# Altium PCB MacroHardPCB.PcbDoc
Units mil, origin at the board's own origin, x right, y up, seen from the top; angles counter-clockwise.
Board outline 3245 x 2910 mil, 4 copper layers (Top, L2, L3, Bottom), stack 59.693 mil thick; 99 components, 88 nets, 351 pads, 130 vias.
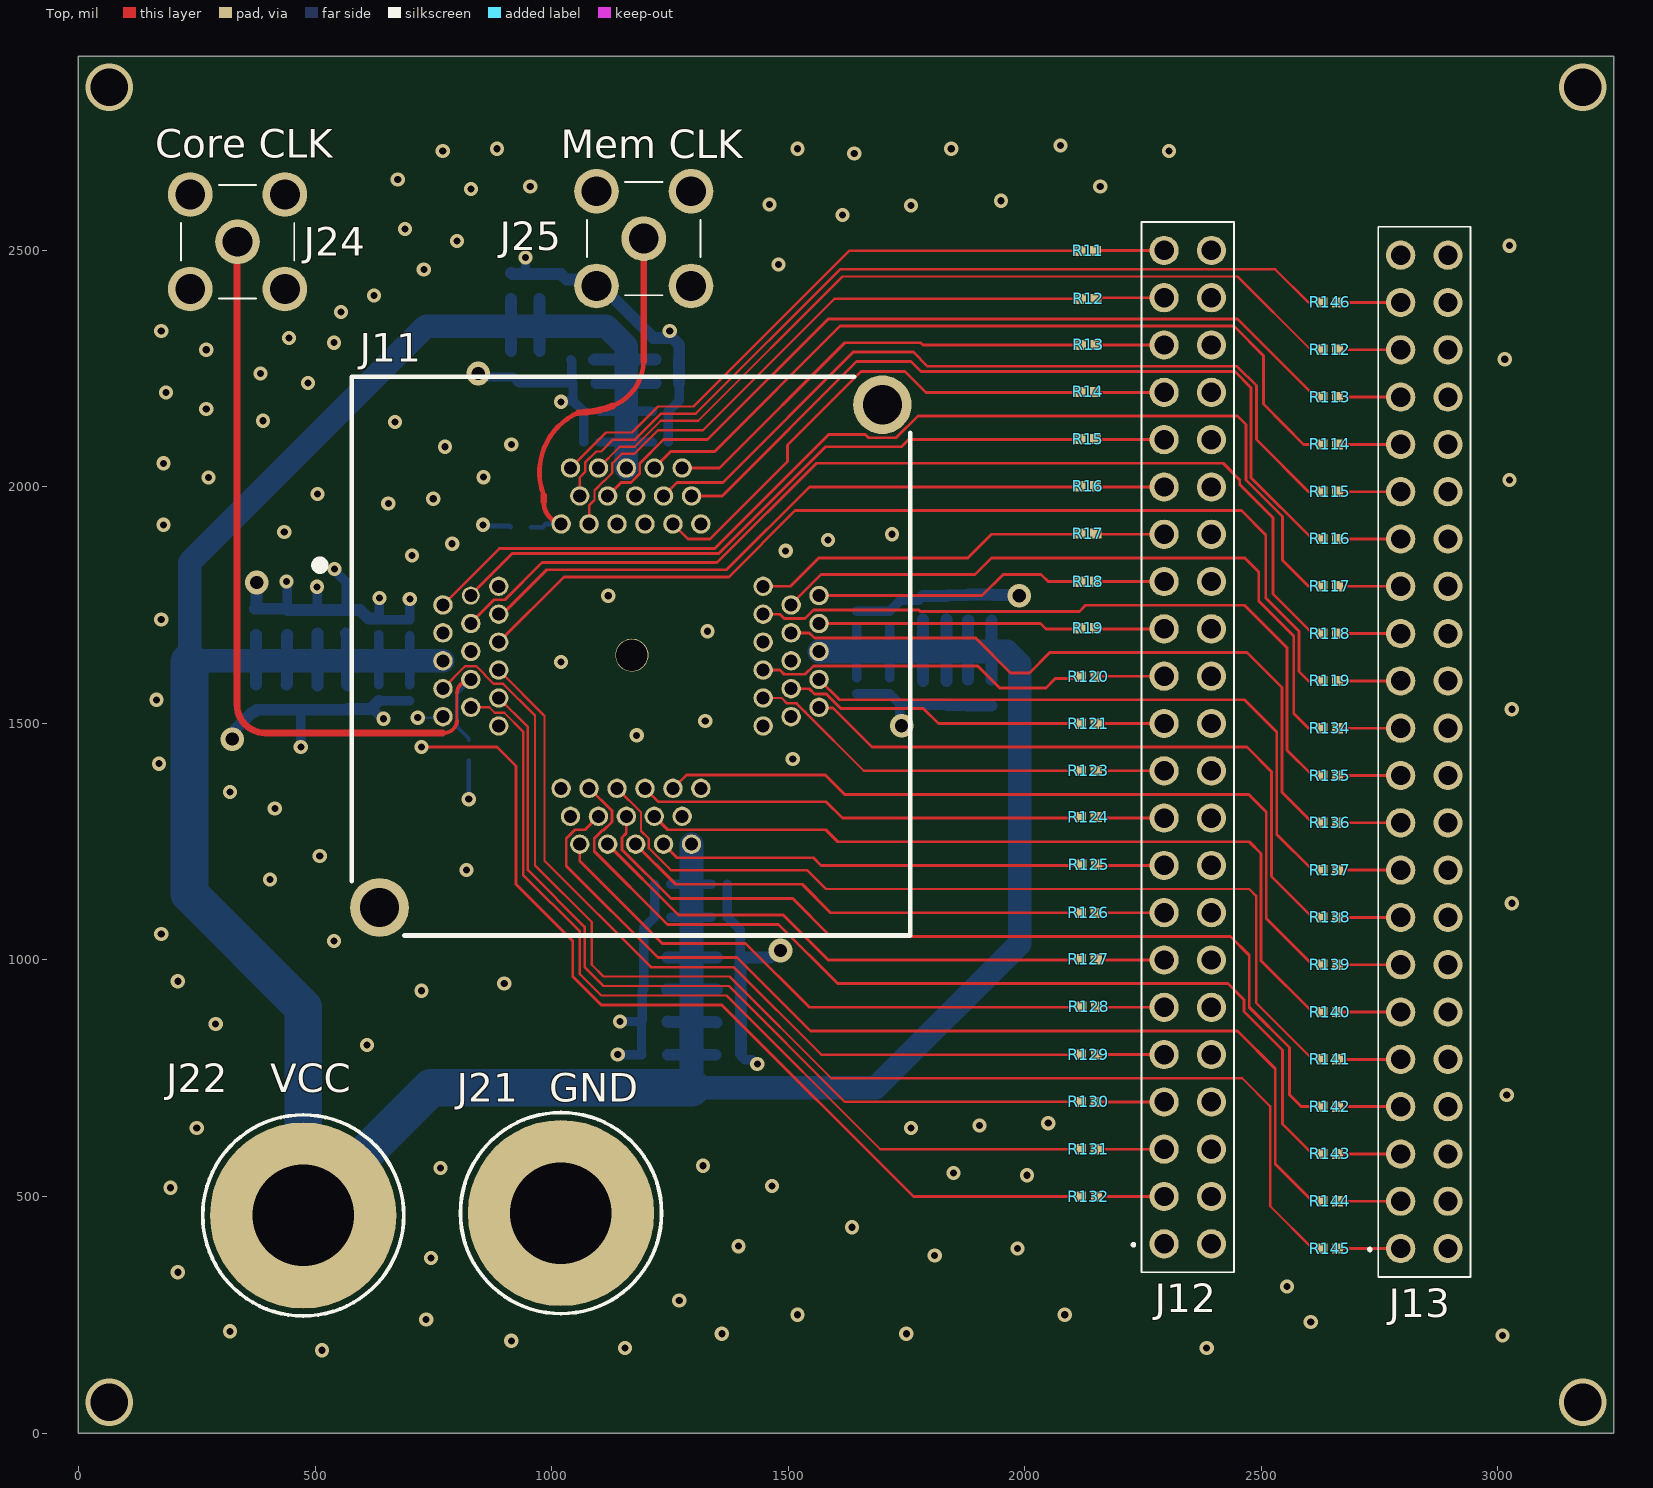
[diagram p0: Top view]
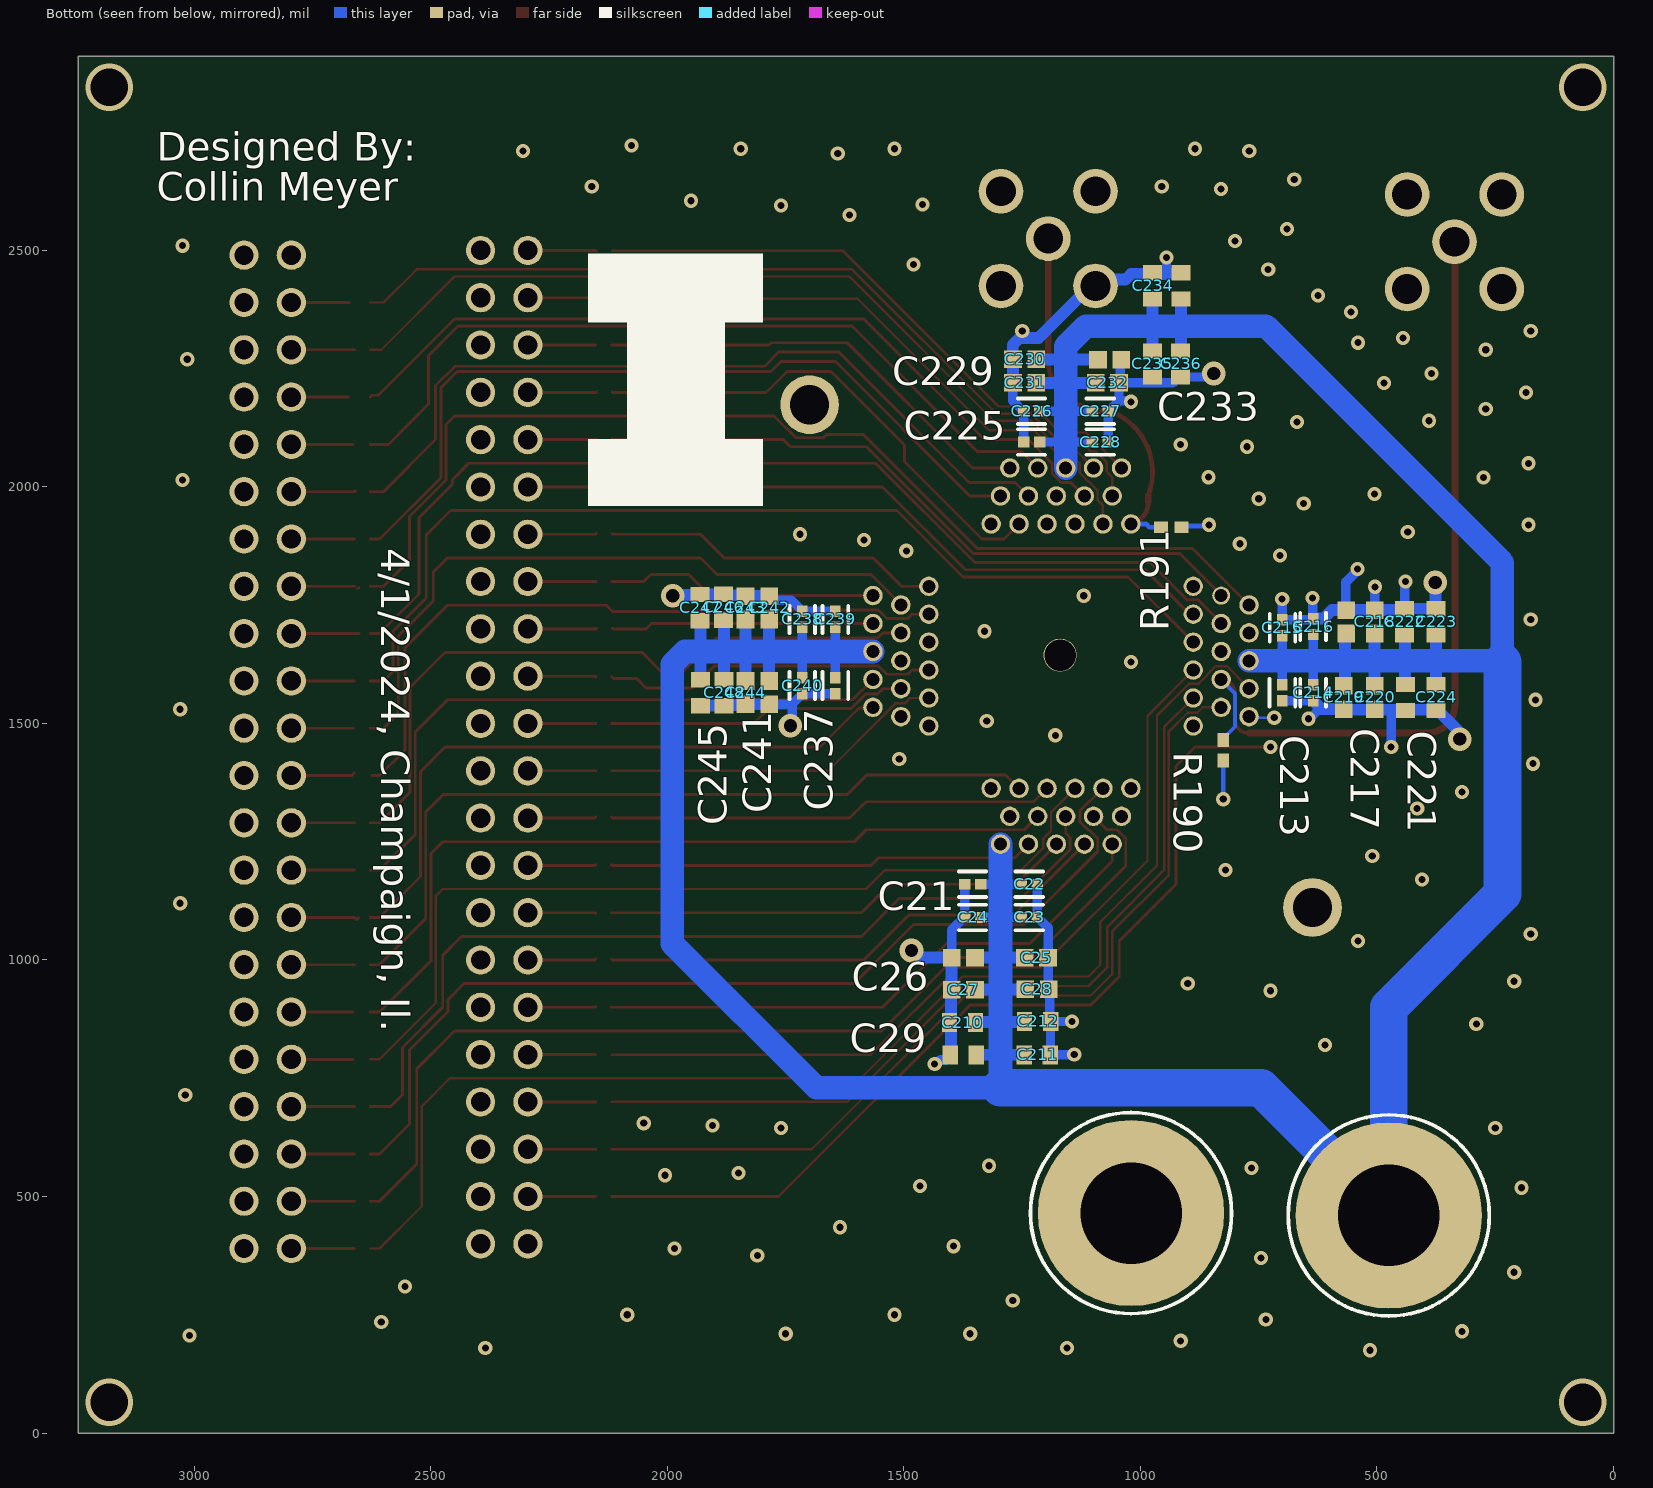
[diagram p1: Bottom view, seen from below]
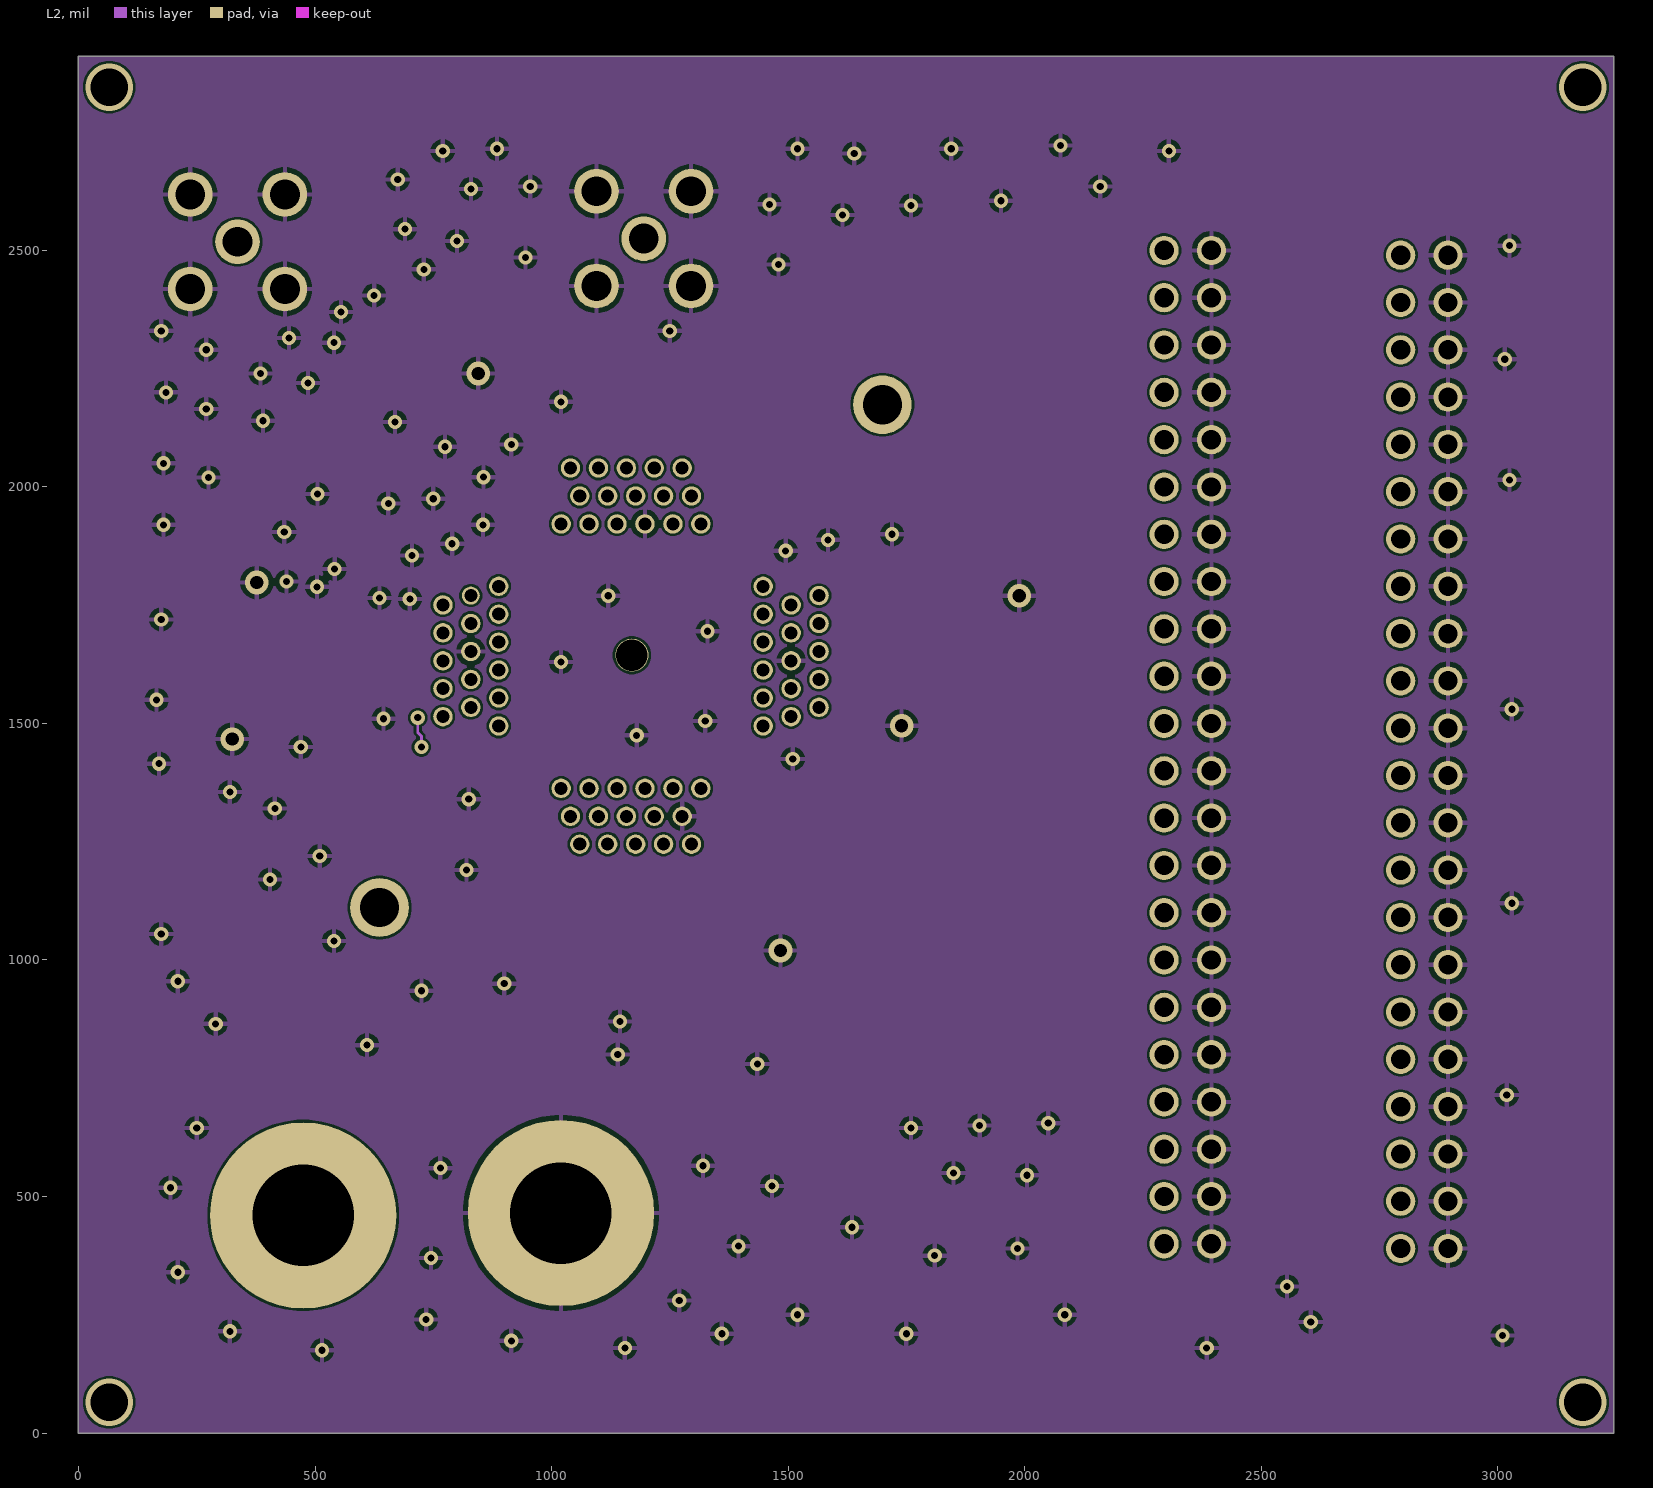
[diagram p2: L2]
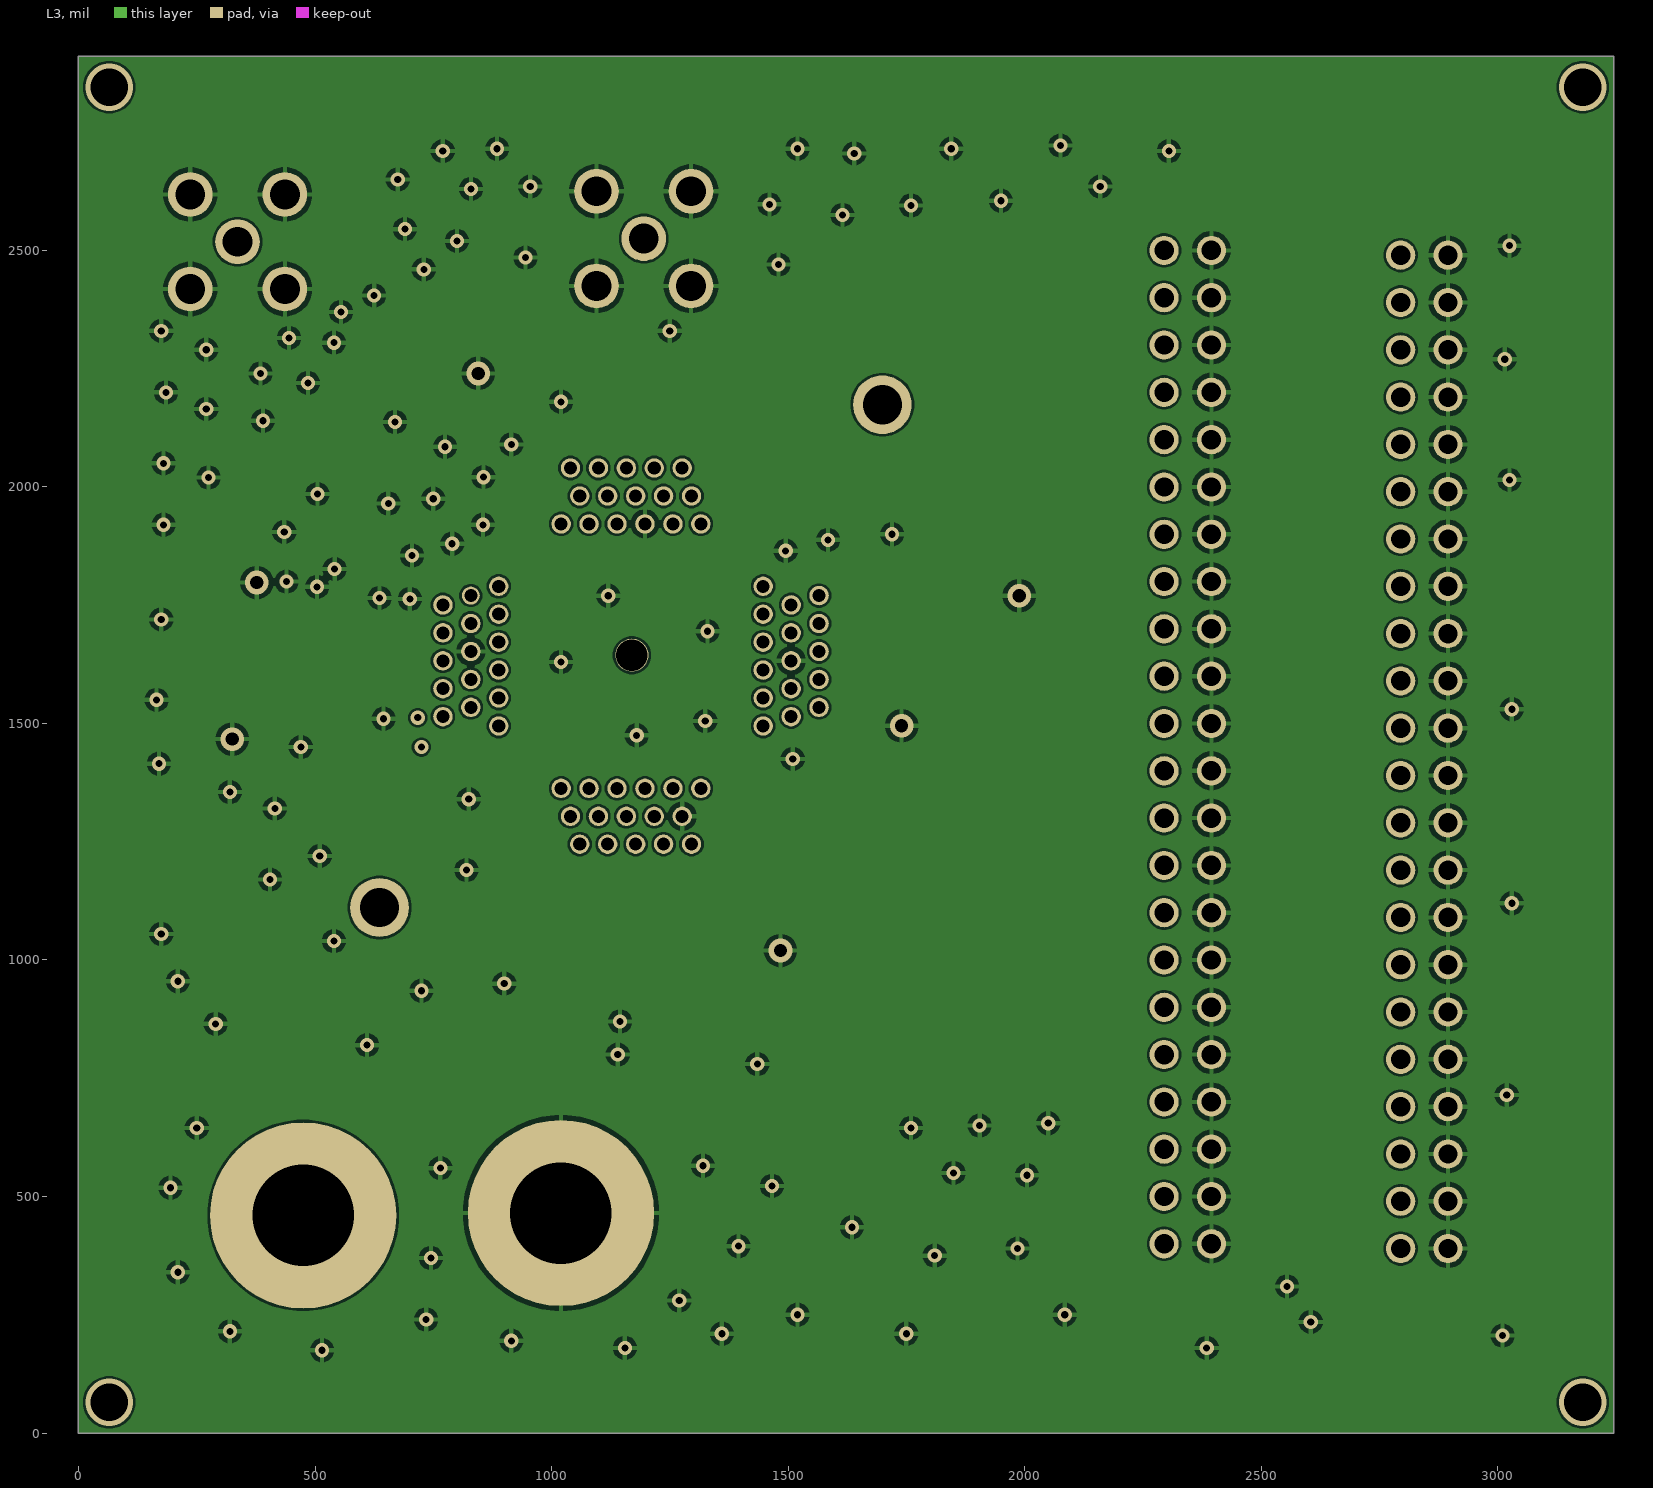
[diagram p3: L3]
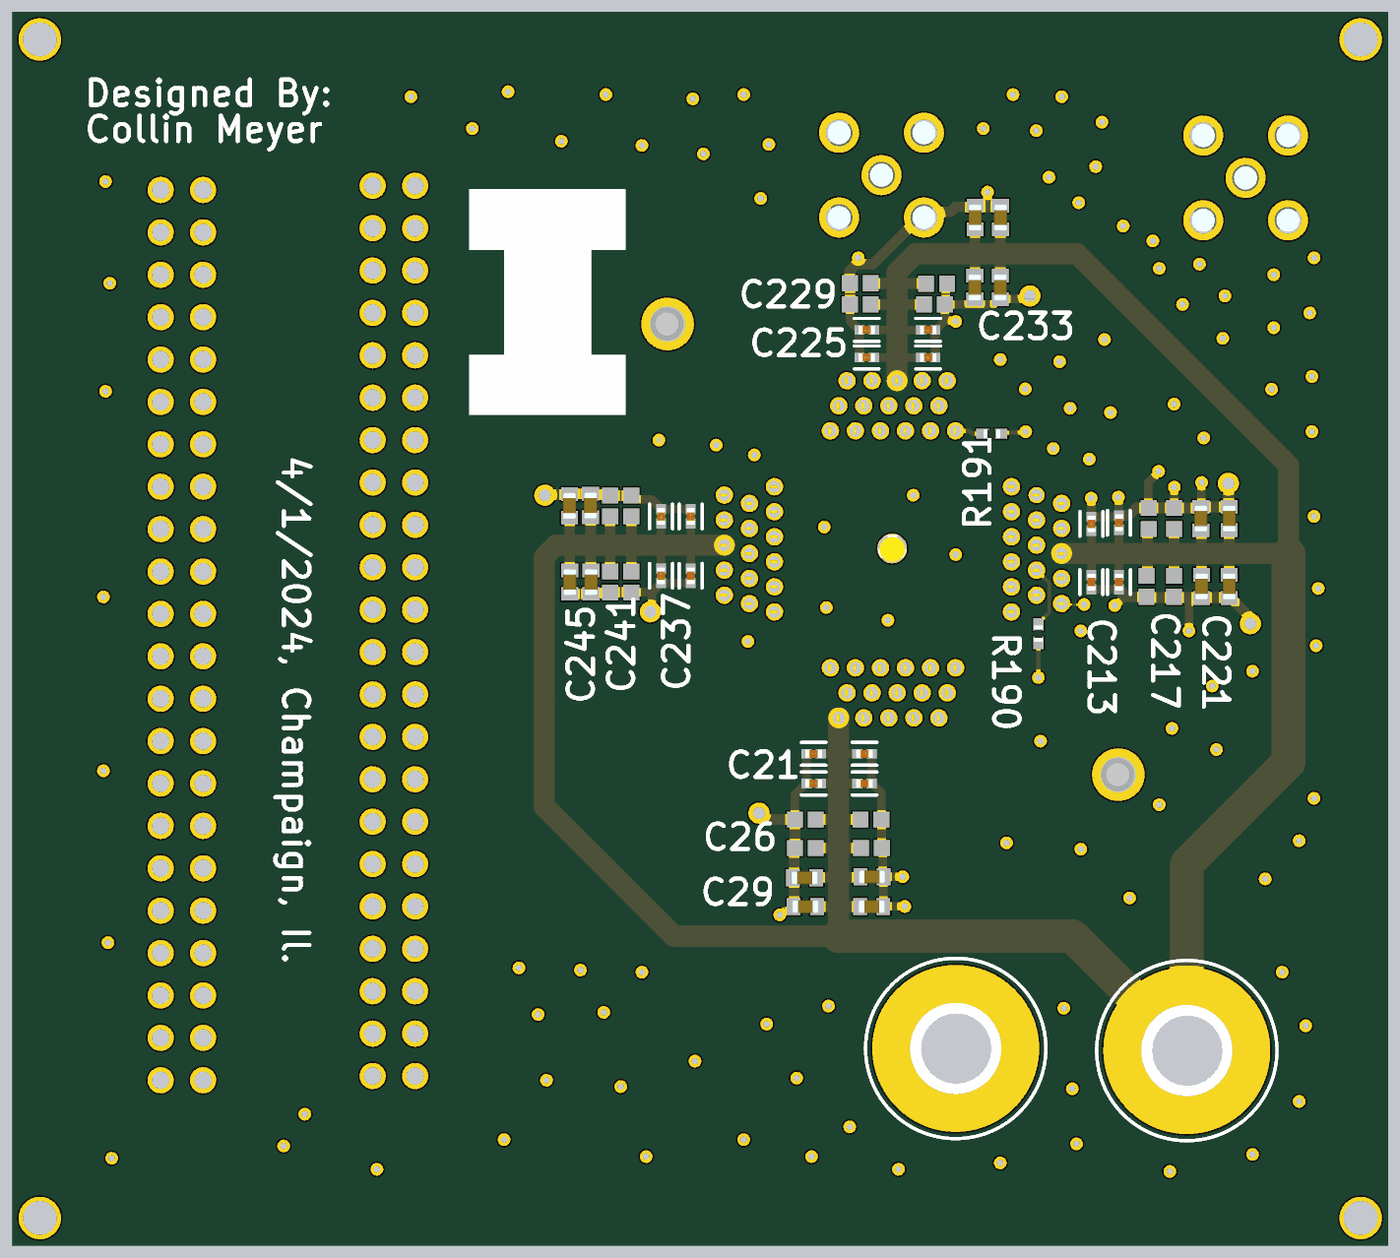
[diagram p4: 3D render of the assembled board from below, using the file's embedded part models]

## Layer stack, top to bottom
Top Solder: solder mask 1, Solder Resist, Dk 3.6
Top: signal copper 1.7008
Prepreg 1: prepreg 7.9567, FR-4, Dk 3.61
L2: signal copper 0.689
Core: core 39, FR-4, Dk 3.61
L3: signal copper 0.689
Prepreg 2: prepreg 7.9567, FR-4, Dk 3.61
Bottom: signal copper 1.7008
Bottom Solder: solder mask 1, Solder Resist, Dk 3.6

## Board outline
0,0 3245,0 3245,2910 0,2910

## Design rules (kind name [scope] priority, off if disabled: settings)
Clearance Clearance_1 [(ExistsOnLayer('L2') Or ExistsOnLayer('L3')) vs (ExistsOnLayer('L2') Or ExistsOnLayer('L3'))] p1: gap=5 ignorepadtopadclearanceinfootprint=FALSE sourcerule=38 cellrowname=All cellrowtype=0 cellcolname=All cellcoltype=0 innerlayers=TRUE
Clearance Clearance_2 [(ExistsOnLayer('Top') Or ExistsOnLayer('Bottom')) vs (ExistsOnLayer('Top') Or ExistsOnLayer('Bottom'))] p2: gap=5 ignorepadtopadclearanceinfootprint=FALSE sourcerule=38 cellrowname=All cellrowtype=0 cellcolname=All cellcoltype=0 outerlayers=TRUE
Clearance [All] p3: gap=10 ignorepadtopadclearanceinfootprint=FALSE ismatrix=TRUE
HoleSize [All] p1: absolutevalues=TRUE maxlimit=100 minlimit=5 maxpercent=80.000 minpercent=20.000
MinimumAnnularRing MinimumAnnularRing_1 [All] p1: minimumring=4
PolygonConnect [All] p1: connectstyle=Relief reliefconductorwidth=10 reliefentries=4 polygonreliefangle="90 Angle" airgapwidth=10
RoutingVias [All] p1: holewidth=28 width=50 viastyle="Through Hole" minholewidth=28 minwidth=50 maxholewidth=28 maxwidth=50
SolderMaskExpansion [All] p1: expansion=4 istentingtop=FALSE
Width MaxMinWidth_1 [All] p1: maxlimit=50 minlimit=5 preferedwidth=5 minimp=50.000000 maximp=50.000000 favimp=50.000000
Width [All] p2: maxlimit=10 minlimit=10 preferedwidth=10
29 further rules are at their usual default settings.

## Classes and differential pairs
component class Main: J11 J12 J13 R11 R12 R13 R14 R15 R16 R17 R18 R19 R112 R113 R114 R115 R116 R117 R118 R119 R120 R121 R123 R124 R125 R126 R127 R128 R129 R130 R131 R132 R134 R135 R136 R137 R138 R139 R140 R141 R142 R143 R144 R145 R146 R190 R191
component class Connectors: C21 C22 C23 C24 C25 C26 C27 C28 C29 C210 C211 C212 C213 C214 C215 C216 C217 C218 C219 C220 C221 C222 C223 C224 C225 C226 C227 C228 C229 C230 C231 C232 C233 C234 C235 C236 C237 C238 C239 C240 C241 C242 C243 C244 C245 C246 C247 C248 J21 J22 J24 J25

## Components (designator, comment, footprint, x,y, rotation, side; value= is the part's Value field where it differs from the comment)
C21 "UMK105BJ104KV-F" FP-0402-L_1_0_0_05-W_0_5-IPC_B 1355,1160 r180 bottom
C22 "UMK105BJ104KV-F" FP-0402-L_1_0_0_05-W_0_5-IPC_B 1235,1160 r0 bottom
C23 "UMK105BJ104KV-F" FP-0402-L_1_0_0_05-W_0_5-IPC_B 1235,1090 r0 bottom
C24 "UMK105BJ104KV-F" FP-0402-L_1_0_0_05-W_0_5-IPC_B 1355,1090 r180 bottom
C25 "LMK107B7105KA-T" CAPC1608X90X35NL10T25 1220,1005 r180 bottom
C26 "LMK107B7105KA-T" CAPC1608X90X35NL10T25 1374.61,1005 r0 bottom
C27 "LMK107B7105KA-T" CAPC1608X90X35NL10T25 1374.59,937.35 r0 bottom
C28 "LMK107B7105KA-T" CAPC1608X90X35NL10T25 1218.79,937.89 r180 bottom
C29 "KGM15CR51A106MT" CAPC1608X100N 1374.59,799.67 r0 bottom
C210 "KGM15CR51A106MT" CAPC1608X100N 1376.25,867.43 r0 bottom
C211 "KGM15CR51A106MT" CAPC1608X100N 1218.1,799.67 r180 bottom
C212 "KGM15CR51A106MT" CAPC1608X100N 1217.44,870 r180 bottom
C213 "UMK105BJ104KV-F" FP-0402-L_1_0_0_05-W_0_5-IPC_B 700,1565 r90 bottom
C214 "UMK105BJ104KV-F" FP-0402-L_1_0_0_05-W_0_5-IPC_B 635,1565 r90 bottom
C215 "UMK105BJ104KV-F" FP-0402-L_1_0_0_05-W_0_5-IPC_B 699.93,1702.25 r270 bottom
C216 "UMK105BJ104KV-F" FP-0402-L_1_0_0_05-W_0_5-IPC_B 635,1705 r270 bottom
C217 "LMK107B7105KA-T" CAPC1608X90X35NL10T25 565,1715 r90 bottom
C218 "LMK107B7105KA-T" CAPC1608X90X35NL10T25 505,1715 r90 bottom
C219 "LMK107B7105KA-T" CAPC1608X90X35NL10T25 570,1555 r270 bottom
C220 "LMK107B7105KA-T" CAPC1608X90X35NL10T25 505,1555 r270 bottom
C221 "KGM15CR51A106MT" CAPC1608X100N 440,1555 r270 bottom
C222 "KGM15CR51A106MT" CAPC1608X100N 441.79,1714.77 r90 bottom
C223 "KGM15CR51A106MT" CAPC1608X100N 375,1715 r90 bottom
C224 "KGM15CR51A106MT" CAPC1608X100N 375,1555 r270 bottom
C225 "UMK105BJ104KV-F" FP-0402-L_1_0_0_05-W_0_5-IPC_B 1230,2095 r180 bottom
C226 "UMK105BJ104KV-F" FP-0402-L_1_0_0_05-W_0_5-IPC_B 1230,2160 r180 bottom
C227 "UMK105BJ104KV-F" FP-0402-L_1_0_0_05-W_0_5-IPC_B 1085,2160 r0 bottom
C228 "UMK105BJ104KV-F" FP-0402-L_1_0_0_05-W_0_5-IPC_B 1085,2095 r0 bottom
C229 "LMK107B7105KA-T" CAPC1608X90X35NL10T25 1065.33,2268.79 r180 bottom
C230 "LMK107B7105KA-T" CAPC1608X90X35NL10T25 1245,2270 r0 bottom
C231 "LMK107B7105KA-T" CAPC1608X90X35NL10T25 1245,2220 r0 bottom
C232 "LMK107B7105KA-T" CAPC1608X90X35NL10T25 1070,2220 r180 bottom
C233 "KGM15CR51A106MT" CAPC1608X100N 914.25,2425 r90 bottom
C234 "KGM15CR51A106MT" CAPC1608X100N 974.25,2425 r90 bottom
C235 "KGM15CR51A106MT" CAPC1608X100N 975,2260 r270 bottom
C236 "KGM15CR51A106MT" CAPC1608X100N 915,2260 r270 bottom
C237 "UMK105BJ104KV-F" FP-0402-L_1_0_0_05-W_0_5-IPC_B 1645,1580 r90 bottom
C238 "UMK105BJ104KV-F" FP-0402-L_1_0_0_05-W_0_5-IPC_B 1715,1720 r270 bottom
C239 "UMK105BJ104KV-F" FP-0402-L_1_0_0_05-W_0_5-IPC_B 1645,1720 r270 bottom
C240 "UMK105BJ104KV-F" FP-0402-L_1_0_0_05-W_0_5-IPC_B 1715,1580 r90 bottom
C241 "LMK107B7105KA-T" CAPC1608X90X35NL10T25 1785,1565.39 r270 bottom
C242 "LMK107B7105KA-T" CAPC1608X90X35NL10T25 1785,1744.61 r90 bottom
C243 "LMK107B7105KA-T" CAPC1608X90X35NL10T25 1835,1744.61 r90 bottom
C244 "LMK107B7105KA-T" CAPC1608X90X35NL10T25 1835,1565.39 r270 bottom
C245 "KGM15CR51A106MT" CAPC1608X100N 1930,1565 r270 bottom
C246 "KGM15CR51A106MT" CAPC1608X100N 1881.25,1745.72 r90 bottom
C247 "KGM15CR51A106MT" CAPC1608X100N 1930.75,1745 r90 bottom
C248 "KGM15CR51A106MT" CAPC1608X100N 1880,1565 r270 bottom
J11 "264-5205-01" 264-5205-01_1 1699.45,2173.89 r0 top
J12 "SSW-122-01-F-D" SSW-122-XX-YYY-D 2295,400 r270 top
J13 "SSW-122-01-F-D" SSW-122-XX-YYY-D 2795,390 r270 top
J21 "575-4" KSTN-575-4 1020,465 r0 top
J22 "575-4" KSTN-575-4 475,460 r0 top
J24 "0733910070" 0733910070 336.29,2518.41 r0 top
J25 "0733910070" 0733910070 1195,2525 r0 top
R11 "ERJ-U020R00X" RESC1005X40X25NL05T10 2133.4,2498.99 r0 top
R12 "ERJ-U020R00X" RESC1005X40X25NL05T10 2134.45,2397.58 r0 top
R13 "ERJ-U020R00X" RESC1005X40X25NL05T10 2134.97,2300.31 r0 top
R14 "ERJ-U020R00X" RESC1005X40X25NL05T10 2133.39,2200.97 r0 top
R15 "ERJ-U020R00X" RESC1005X40X25NL05T10 2133.39,2101.34 r0 top
R16 "ERJ-U020R00X" RESC1005X40X25NL05T10 2133.39,2001.7 r0 top
R17 "ERJ-U020R00X" RESC1005X40X25NL05T10 2133.75,1901.36 r0 top
R18 "ERJ-U020R00X" RESC1005X40X25NL05T10 2133.75,1799.62 r0 top
R19 "ERJ-U020R00X" RESC1005X40X25NL05T10 2133.4,1701.39 r0 top
R112 "ERJ-U020R00X" RESC1005X40X25NL05T10 2645,2290 r0 top
R113 "ERJ-U020R00X" RESC1005X40X25NL05T10 2645,2190 r0 top
R114 "ERJ-U020R00X" RESC1005X40X25NL05T10 2645,2090 r0 top
R115 "ERJ-U020R00X" RESC1005X40X25NL05T10 2645,1990 r0 top
R116 "ERJ-U020R00X" RESC1005X40X25NL05T10 2645,1890 r0 top
R117 "ERJ-U020R00X" RESC1005X40X25NL05T10 2645,1790 r0 top
R118 "ERJ-U020R00X" RESC1005X40X25NL05T10 2645,1690 r0 top
R119 "ERJ-U020R00X" RESC1005X40X25NL05T10 2645,1590 r0 top
R120 "ERJ-U020R00X" RESC1005X40X25NL05T10 2134.45,1598.59 r0 top
R121 "ERJ-U020R00X" RESC1005X40X25NL05T10 2134.95,1499.66 r0 top
R123 "ERJ-U020R00X" RESC1005X40X25NL05T10 2134.95,1399.67 r0 top
R124 "ERJ-U020R00X" RESC1005X40X25NL05T10 2134.95,1302.15 r0 top
R125 "ERJ-U020R00X" RESC1005X40X25NL05T10 2135.49,1201.46 r0 top
R126 "ERJ-U020R00X" RESC1005X40X25NL05T10 2134.95,1099.36 r0 top
R127 "ERJ-U020R00X" RESC1005X40X25NL05T10 2134.95,1001.79 r0 top
R128 "ERJ-U020R00X" RESC1005X40X25NL05T10 2135.49,901.18 r0 top
R129 "ERJ-U020R00X" RESC1005X40X25NL05T10 2135,800 r0 top
R130 "ERJ-U020R00X" RESC1005X40X25NL05T10 2134.95,700 r0 top
R131 "ERJ-U020R00X" RESC1005X40X25NL05T10 2134.95,600.01 r0 top
R132 "ERJ-U020R00X" RESC1005X40X25NL05T10 2135,500 r0 top
R134 "ERJ-U020R00X" RESC1005X40X25NL05T10 2645,1490 r0 top
R135 "ERJ-U020R00X" RESC1005X40X25NL05T10 2645,1390 r0 top
R136 "ERJ-U020R00X" RESC1005X40X25NL05T10 2645,1290 r0 top
R137 "ERJ-U020R00X" RESC1005X40X25NL05T10 2645,1190 r0 top
R138 "ERJ-U020R00X" RESC1005X40X25NL05T10 2645,1090 r0 top
R139 "ERJ-U020R00X" RESC1005X40X25NL05T10 2645,990 r0 top
R140 "ERJ-U020R00X" RESC1005X40X25NL05T10 2645,890 r0 top
R141 "ERJ-U020R00X" RESC1005X40X25NL05T10 2645,790 r0 top
R142 "ERJ-U020R00X" RESC1005X40X25NL05T10 2645,690 r0 top
R143 "ERJ-U020R00X" RESC1005X40X25NL05T10 2645,590 r0 top
R144 "ERJ-U020R00X" RESC1005X40X25NL05T10 2645,490 r0 top
R145 "ERJ-U020R00X" RESC1005X40X25NL05T10 2645,390 r0 top
R146 "ERJ-U020R00X" RESC1005X40X25NL05T10 2645,2390 r0 top
R190 "RT0402BRE0750RL" RESC1005X35N 825,1443.35 r90 bottom
R191 "RT0402BRE0750RL" RESC1005X35N 935,1915 r0 bottom

## Footprints (in the part's own frame and the unit in brackets; to place one, negate y for a bottom-side part, rotate by r counter-clockwise, add the part's x,y. Pads: shape width x height; smd on the part's side, far side on the other; paste and mask are expansions set on the pad)
264-5205-01_1 [mm]
  round 1.041 hole 0.7: 1(-20.6,-9.75) 3(-23.6,-10.75) 4(-20.6,-11.25) 5(-22.1,-11.75) 6(-23.6,-12.25) 7(-20.6,-12.75) 8(-22.1,-13.25) 9(-23.6,-13.75) 10(-20.6,-14.25) 11(-22.1,-14.75) 12(-23.6,-15.25) 13(-20.6,-15.75) 14(-22.1,-16.25) 15(-23.6,-16.75) 16(-20.6,-17.25) 17(-17.25,-20.6) 18(-16.75,-22.1) 19(-16.25,-23.6) 20(-15.75,-20.6) 21(-15.25,-22.1) 22(-14.75,-23.6) 23(-14.25,-20.6) 24(-13.75,-22.1) 25(-13.25,-23.6) 26(-12.75,-20.6) 27(-12.25,-22.1) 28(-11.75,-23.6) 29(-11.25,-20.6) 30(-10.75,-22.1) 31(-10.25,-23.6) 32(-9.75,-20.6) 33(-6.4,-17.25) 34(-4.9,-16.75) 35(-3.4,-16.25) 36(-6.4,-15.75) 37(-4.9,-15.25) 38(-3.4,-14.75) 39(-6.4,-14.25) 40(-4.9,-13.75) 41(-3.4,-13.25) 42(-6.4,-12.75) 43(-4.9,-12.25) 44(-3.4,-11.75) 45(-6.4,-11.25) 46(-4.9,-10.75) 47(-3.4,-10.25) 48(-6.4,-9.75) 49(-9.75,-6.4) 50(-10.25,-4.9) 51(-10.75,-3.4) 52(-11.25,-6.4) 53(-11.75,-4.9) 54(-12.25,-3.4) 55(-12.75,-6.4) 56(-13.25,-4.9) 57(-13.75,-3.4) 58(-14.25,-6.4) 59(-14.75,-4.9) 60(-15.25,-3.4) 61(-15.75,-6.4) 62(-16.25,-4.9) 63(-16.75,-3.4) 64(-17.25,-6.4)
  round 1.778 hole 1.7: 1(-13.45,-13.45)
  round 0.965 hole 0.7: 2(-22.1,-10.25)
  round 3.15 hole 2.1: 65(0,0) 66(-27,-27)
  silkscreen extent -30.42,-28.5 1.5,1.5, body extent -28.46,-28.5 1.54,1.5, height 16.96
0733910070 [mm]
  round 2.4 hole 1.6: 1(0,0) 2(-2.54,2.54) 3(-2.54,-2.54) 4(2.54,-2.54) 5(2.54,2.54)
  silkscreen extent -3.04,-3.04 3.04,3.04, body extent -3.24,-3.23 3.24,3.23, height 10.1
CAPC1608X90X35NL10T25 [mm] "Chip Capacitor, 2-Leads, Body 1.70x0.90mm, IPC Medium Density"
  rect 0.95x0.95 smd: 1(-0.625,0) 2(0.625,0)
  body extent -0.85,-0.45 0.85,0.45, height 0.9
CAPC1608X100N [mm]
  rect 0.82x1.02 smd: 1(-0.7,0) 2(0.7,0)
  body extent -0.8,-0.4 0.8,0.4, height 1
FP-0402-L_1_0_0_05-W_0_5-IPC_B [mil]
  rect 24.23x22.54 smd paste+0 mask+0: 1(-16.87,0) 2(16.87,0)
  silkscreen extent -29,-27 29,27, body extent -20,-10 20,10, height 22
KSTN-575-4 [mm] "Banana Jack, Non-Insulated, Dia 7.92mm"
  round 10 hole 5.45: 1(0,0)
  silkscreen extent -5.4,-5.4 5.4,5.4, body extent -3.98,-3.96 3.92,3.94, height 2.36
RESC1005X35N [mm]
  rect 0.75x0.6 smd: 1(-0.55,0) 2(0.55,0)
  body extent -0.5,-0.25 0.5,0.25, height 0.35
RESC1005X40X25NL05T10 [mm] "Chip Resistor, 2-Leads, Body 1.00x0.50mm, IPC Medium Density"
  rect 0.6x0.55 smd: 1(-0.425,0) 2(0.425,0)
  body extent -0.53,-0.27 0.53,0.28, height 0.4
SSW-122-XX-YYY-D [mm]
  round 1.57 hole 1.04: 1(0,0) 2(0,2.54) 3(-2.54,0) 4(-2.54,2.54) 5(-5.08,0) 6(-5.08,2.54) 7(-7.62,0) 8(-7.62,2.54) 9(-10.16,0) 10(-10.16,2.54) 11(-12.7,0) 12(-12.7,2.54) 13(-15.24,0) 14(-15.24,2.54) 15(-17.78,0) 16(-17.78,2.54) 17(-20.32,0) 18(-20.32,2.54) 19(-22.86,0) 20(-22.86,2.54) 21(-25.4,0) 22(-25.4,2.54) 23(-27.94,0) 24(-27.94,2.54) 25(-30.48,0) 26(-30.48,2.54) 27(-33.02,0) 28(-33.02,2.54) 29(-35.56,0) 30(-35.56,2.54) 31(-38.1,0) 32(-38.1,2.54) 33(-40.64,0) 34(-40.64,2.54) 35(-43.18,0) 36(-43.18,2.54) 37(-45.72,0) 38(-45.72,2.54) 39(-48.26,0) 40(-48.26,2.54) 41(-50.8,0) 42(-50.8,2.54) 43(-53.34,0) 44(-53.34,2.54)
  silkscreen extent -54.87,-1.7 1.53,3.74

## Part data
C21 C22 C23 C24 C213 C214 C215 C216 C225 C226 C227 C228 C237 C238 C239 C240: library part CMP-14477-000330-2, "None", Capacitance=100nF, Case Code (Imperial)=0402, Case Code (Metric)=1005, Dielectric=X5R, Max Operating Temperature=85°C, Min Operating Temperature=-55°C, Package Quantity=10000, Tolerance=10%, Voltage Rating=50V, Case/Package=0402, Halogen Free="Halogen Free", Height=0.5mm, Length=0.039inch, Mount="Surface Mount", Packaging="Tape and Reel", RoHS Compliant=Yes, Termination=SMD/SMT, Thickness=0.022inch, Voltage Rating (DC)=50V, Width=0.02inch
C25 C26 C27 C28 C217 C218 C219 C220 C229 C230 C231 C232 C241 C242 C243 C244: library part CMP-2000-05445-2, "None", Capacitance=1uF, Case Code (Imperial)=0603, Case Code (Metric)=1608, Dielectric=X7R, Max Operating Temperature=125°C, Min Operating Temperature=-55°C, Package Quantity=1, Resistor Type=Ceramic, Tolerance=10%, Voltage Rating=10V, Case/Package=0603, Construction=Flat, Depth=0.8mm, Halogen Free="Halogen Free", Height=0.8mm, Lead Free="Lead Free", Length=1.6mm, Mount="Surface Mount", Number of Pins=2, Packaging="Tape and Reel", Radiation Hardening=No, REACH SVHC="No SVHC", RoHS Compliant=Yes, Series=M, Termination=SMD/SMT, Thickness=0.035inch, Voltage Rating (DC)=10V, Width=0.031inch
C29 C210 C211 C212 C221 C222 C223 C224 C233 C234 C235 C236 C245 C246 C247 C248: "Capacitor", Manufacturer_Name=AVX, Datasheet Link=https://4donline.ihs.com/images/VipMasterIC/IC/AVXC/AVXC-S-A0018162488/AVXC-S-A0018400965-1.pdf?hkey=EF798316E3902B6ED9A73243A3159BB0, Height=1mm, Manufacturer_Part_Number=KGM15CR51A106MT
J11: "Connector", Manufacturer_Name=3M, Mouser Part Number=517-264-5205-01, Datasheet Link=http://multimedia.3m.com/mws/media/785854O/3mtm-textooltm-open-top-sockets-for-qfn-applications-cd2475.pdf, Manufacturer_Part_Number=264-5205-01, Mouser Price/Stock=https://www.mouser.co.uk/ProductDetail/3M-Electronic-Solutions-Division/264-5205-01?qs=B2toaPEvOxGh%252BVXp%252BJO7wQ%3D%3D
J12 J13: "Connector", Manufacturer_Name=SAMTEC, Mouser Part Number=200-SSW12201FD, Arrow Part Number=SSW-122-01-F-D, Arrow Price/Stock=https://www.arrow.com/en/products/ssw-122-01-f-d/samtec, Datasheet Link=http://suddendocs.samtec.com/prints/ssw-1xx-xx-xxx-x-xx-xxx-xx-mkt.pdf, Manufacturer_Part_Number=SSW-122-01-F-D, Mouser Price/Stock=https://www.mouser.co.uk/ProductDetail/Samtec/SSW-122-01-F-D?qs=92ilVni64gyO3fMj7LXwKw%3D%3D
J21 J22: library part CMP-2000-05649-1, "Banana Jack, Non-Insulated, 1-Pin THD, RoHS, Bulk", Color=-, Manufacturer=Keystone-Electronics, Package Description="1-Pin Through Hole Device, Dia 7.92 mm", Package Version="Rev. B, 11/1994", Body Material=-, Category=Connectors,Interconnects, Contact Finish=Nickel, Contact Material=Brass, Datasheet URL=http://www.keyelco.com/product-pdf.cfm?p=2379, Datasheet Version="Rev. B, 11/1994", Family=BananaandTipConnectors-Jacks,Plugs, Features=-, Gender=Female, Insulation=Non-Insulated, Manufacturer URL=http://www.keyelco.com/, Mounting Technology=ThroughHole, Mounting Type=ThroughHole, Operating Temperature=-, Package Reference=575-4, Package URL=http://www.keyelco.com/product-pdf.cfm?p=2379, Packaging=Bulk, Plug/Mating Plug Diameter=StandardBanana, Series=-, Termination=Solder, Type=BananaJack, Wire Gauge=-
J24 J25: "Connector", Manufacturer_Name=Molex, Mouser Part Number=N/A, Arrow Part Number=0733910070, Arrow Price/Stock=https://www.arrow.com/en/products/0733910070/molex, Datasheet Link=https://www.molex.com/pdm_docs/sd/733910070_sd.pdf, Height=10mm, Manufacturer_Part_Number=0733910070, Mouser Price/Stock=https://www.mouser.co.uk/ProductDetail/Molex/0733910070?qs=PBcRNPEHKsq1tOlFMTxPGQ%3D%3D
R11 R12 R13 R14 R15 R16 R17 R18 R19 R112 R113 R114 R115 R116 R117 R118 R119 R120 R121 R123 R124 R125 R126 R127 R128 R129 R130 R131 R132 R134 R135 R136 R137 R138 R139 R140 R141 R142 R143 R144 R145 R146: library part CMP-2002-06457-1, Manufacturer=Panasonic, Part Number=ERJ-U020R00X
R190 R191: "Resistor", Manufacturer_Name=YAGEO, Mouser Part Number=603-RT0402BRE0750RL, Arrow Part Number=RT0402BRE0750RL, Arrow Price/Stock=https://www.arrow.com/en/products/rt0402bre0750rl/yageo?region=nac, Datasheet Link=https://www.mouser.com/datasheet/2/447/PYu_RT_1_to_0_01_RoHS_L_12-3003070.pdf, Height=0.35mm, Manufacturer_Part_Number=RT0402BRE0750RL, Mouser Price/Stock=https://www.mouser.co.uk/ProductDetail/YAGEO/RT0402BRE0750RL?qs=NgbZBzc1CyFyREnSBGZFUg%3D%3D

## Via types
v1: diameter 30, hole 15, Top to Bottom, 120 vias
v2: diameter 50, hole 28, Top to Bottom, 6 vias
v3: diameter 100, hole 80, Top to Bottom, 4 vias

## Nets (pads, with @x,y where several pads share a name; then routed paths per layer and width w, separated by ;. In a path a pad name is that pad's centre, name@x,y a point inside that pad or via, vN(x,y) a via of type N, cw(c..) or ccw(c..) an arc to the next point about the centre after c; other vN are vias at no path point)
core_clk: J11.11 J24.1 R190.2 | length 1701.5
  Top w5: 800,1505 800,1565
  Top w8: 770,1480 ccw(c772.5,1507.5) 800,1505 ; 800,1565 cw(c827.61,1563.24) J11.11@829.37,1590.86
  Top w14.28: 335,1540 335,2470
  Top w14.29: 335,1540 ccw(c395,1540) 395,1480 770,1480
  L2 w5: J11.11@829.37,1588.54 J11.11
  Bottom w8: R190.2 825,1467.95 799.87,1493.08 799.87,1563.68 J11.11
exc_led: J11.7 R119.1 | length 2132.3
  Top w6: J11.7 1026.5,1810 1375,1810 1515,1950 2458.73,1950 2510,1898.73 2510,1765 2580,1695 2580,1610 2600,1590 R119.1
GND: C21.1 C22.1 C23.1 C24.1 C25.2 C26.2 C27.2 C28.2 C29.2 C210.2 C211.2 C212.2 C213.1 C214.1 C215.1 C216.1 C217.2 C218.2 C219.2 C220.2 C221.2 C222.2 C223.2 C224.2 C225.1 C226.1 C227.1 C228.1 C229.2 C230.2 C231.2 C232.2 C233.2 C234.2 C235.2 C236.2 C237.1 C238.1 C239.1 C240.1 C241.2 C242.2 C243.2 C244.2 C245.2 C246.2 C247.2 C248.2 J11.8 J11.30 J11.40 J11.55 J12.2 J12.4 J12.6 J12.8 J12.10 J12.12 J12.14 J12.16 J12.18 J12.20 J12.22 J12.24 J12.26 J12.28 J12.30 J12.32 J12.34 J12.36 J12.38 J12.40 J12.42 J12.44 J13.2 J13.4 J13.6 J13.8 J13.10 J13.12 J13.14 J13.16 J13.18 J13.20 J13.22 J13.24 J13.26 J13.28 J13.30 J13.32 J13.34 J13.36 J13.38 J13.40 J13.42 J13.44 J21.1 J24.2 J24.3 J24.4 J24.5 J25.2 J25.3 J25.4 J25.5 R190.1 R191.1 | length 4141.2
  Top w5: J11.40@1501.46,1637.62 J11.40
  Bottom w10: v1(825,1340) R190.1 ; v1(855,1920) 857.5,1917.5 910.85,1917.5 R191.1
  Bottom w20: C222.2@439.35,1742.44 440.89,1743.99 440.89,1799.1 v1(440,1800) ; v1(470,1450) 470,1523.44 475.47,1528.92 ; v1(504.43,1788.86) 504.72,1788.57 504.72,1740.28 C218.2@505,1740 ; v1(541.49,1826.31) 541.49,1823.6 565.74,1799.36 565.74,1748.31 565,1747.57 C217.2@565,1740 ; 617.27,1530.39 621.9,1530.39 642.29,1510 v1(645,1510) ; C214.1 C213.1 ; v1(636.41,1765.44) 635.71,1764.73 635.71,1722.58 C216.1 635,1721.03 636.91,1719.12 C215.1 700.19,1719.38 700.19,1762.91 v1(700.44,1763.17) ; v2(845,2240) 852.56,2232.44 C236.2 918.94,2232.44 931.38,2220 C232.2 ; 945,2450 v1(945,2485) ; v1(1020,2180) 1021.89,2181.89 1045.39,2181.89 ; C229.2 1043.06,2266.45 1043.06,2222.33 C232.2 ; C228.1 C227.1 1067.28,2160 1045.39,2181.89 ; v1(1140,800) 1140.17,799.83 C211.2@1190.37,799.83 ; v1(1145,870) C212.2 ; C211.2 C211.2@1190.37,799.83 ; C22.1 C23.1 1217.28,1090 1195.39,1068.11 C25.2 1194.79,1004.39 1194.79,938.5 C28.2 1192.03,935.74 1192.03,872.15 C212.2 ; C225.1 C226.1 1247.72,2160 1269.61,2181.89 C231.2 ; C21.1 C24.1 1372.72,1090 1399.21,1063.5 C26.2 ; C29.2@1400.67,801.14 1400.67,797.21 1408.29,789.59 1422.71,789.59 1432.29,780 v1(1435,780) ; C237.1 C240.1 1715,1562.28 1736.5,1540.79 ; C239.1 C238.1 1715,1737.72 1737.8,1760.51 1776.3,1760.51 C242.2 ; v2(1740,1495) 1736.5,1498.5 1736.5,1540.79 ; C241.2 1736.5,1540.79 ; 1045.39,2181.89 C232.2 ; C212.2 1190.21,869.67 1190.21,799.99 C211.2@1190.37,799.83
  Bottom w25: v2(325,1467) 329.78,1471.78 329.78,1486.16 367.42,1523.8 371.36,1523.8 376.48,1528.92 475.47,1528.92 568.52,1528.92 C219.2 617.27,1530.39 C214.1 ; v2(377,1798) 376,1797 376,1746 372.44,1742.44 439.35,1742.44 441.79,1740 505,1740 565,1740 595,1740 613.13,1721.87 C216.1 ; C233.2 916.81,2450 945,2450 1020,2450 1031.7,2438.3 1081.7,2438.3 J25.3 1105,2425 1215,2315 1255.36,2315 1270,2300.36 1270,2270.39 C230.2 C231.2 ; C29.2@1400.67,801.14 1400.67,935.87 C27.2 C26.2 1462.15,1005 1477.18,1020.03 v2(1483.94,1020.03) ; C241.2 C244.2 1836.67,1539.11 1878.33,1539.11 C248.2 C245.2 ; C242.2 C243.2 1837.04,1771.25 1879.21,1771.25 C246.2 1881.61,1772.92 1930.39,1772.92 C247.2 1932.01,1771.29 1987.68,1771.29 v2(1988.94,1770.03)
  other v1: 515,175 1155,180 2385,180 915,195 3010.52,206.1 1360,210 1750,210 320,215 2605,235 735,240 1520,250 2085,250 1270,280 2555,310 210,340 745,370 1810,375 1985,390 1395,395 1635,435 194.54,518.57 1465.8,522.51 2005,545 1850,550 765,560 1320,565 250,645 1760,645 1905,650 2050,655 3019.4,714.56 610,820 290,865 725,935 900,950 210,955 540,1040 175,1055 3030,1120 405,1170 820,1190 510,1220 415,1320 319.99,1355 170,1415 1510,1425 1180,1475 1325,1505 3030,1530 165,1550 1020,1630 1330,1695 175,1720 1120,1770 705,1855 1495,1865 790,1880 1584.73,1888.15 1720,1900 435,1905 180,1920 655,1965 750,1975 505,1985 3025,2015 275,2020 855.96,2020.68 180,2050 775,2085 915,2090 669.2,2137.31 390,2140 270,2165 185,2200 485,2220 385,2240 3015,2270 270,2290 540,2305 445,2315 175,2330 1250,2330 555,2370 625,2405 730,2460 1480,2470 3025,2510.01 800,2520 690,2545 1615,2575 1760,2595 1460.71,2597.42 1950,2605 830,2630 955,2635 2160,2635 675,2650 1640,2705 770,2710 2305,2710 885,2715 1520,2715 1845,2715 2075.75,2721.76
mem_clk: J11.64 J25.1 R191.2 | length 1599.2
  Top w10: 978.07,2062.08 cw(c1112.37,2030.97) 1056.55,2157.02 ; 978.07,2062.08 ccw(c1112.37,2030.97) 983.6,1981.75 ; 978.07,2062.08 cw(c1112.37,2030.97) 1056.55,2157.02 ; 978.07,2062.08 ccw(c1112.37,2030.97) 983.6,1981.75 ; 978.07,2062.08 cw(c1112.37,2030.97) 1056.55,2157.02 ; 978.07,2062.08 ccw(c1112.37,2030.97) 983.6,1981.75 ; 983.42,1969.02 ccw(c1031.07,1968.35) J11.64 ; 983.42,1969.02 ccw(c1031.07,1968.35) J11.64 ; 983.42,1969.02 ccw(c1031.07,1968.35) J11.64 ; 1129.52,2171.4 ccw(c1089.94,2268.79) 1195,2265.33 ; 1129.52,2171.4 ccw(c1089.94,2268.79) 1195,2265.33 ; 1129.52,2171.4 ccw(c1089.94,2268.79) 1195,2265.33
  Top w14.29: 983.42,1969.02 983.6,1981.75 ; 1056.55,2157.02 1074.65,2158.44 ccw(c1060.26,2341.86) 1129.52,2171.4 ; 1195,2265.33 J25.1
  Bottom w10: R191.2 981.26,1915 988.18,1921.92 J11.64
NetJ12_3: J12.3 R132.2 | length 143.3
  Top w6: R132.2 J12.3
NetJ12_5: J12.5 R131.2 | length 143.3
  Top w6: R131.2 J12.5
NetJ12_7: J12.7 R130.2 | length 143.3
  Top w6: R130.2 J12.7
NetJ12_9: J12.9 R129.2 | length 143.3
  Top w6: R129.2 J12.9
NetJ12_11: J12.11 R128.2 | length 143.3
  Top w6: R128.2 2153.4,900 J12.11
NetJ12_13: J12.13 R127.2 | length 144.1
  Top w6: R127.2 2153.47,1000 J12.13
NetJ12_15: J12.15 R126.2 | length 143.6
  Top w6: R126.2 2152.32,1100 J12.15
NetJ12_17: J12.17 R125.2 | length 143.4
  Top w6: R125.2 2153.69,1200 J12.17
NetJ12_19: J12.19 R124.2 | length 144.2
  Top w6: R124.2 2153.83,1300 J12.19
NetJ12_21: J12.21 R123.2 | length 143.5
  Top w6: R123.2 2152.01,1400 J12.21
NetJ12_23: J12.23 R121.2 | length 143.5
  Top w6: R121.2 2152.02,1500 J12.23
NetJ12_25: J12.25 R120.2 | length 144.4
  Top w6: R120.2 2152.59,1600 J12.25
NetJ12_27: J12.27 R19.2 | length 145.4
  Top w6: R19.2 2151.52,1700 J12.27
NetJ12_29: J12.29 R18.2 | length 144.7
  Top w6: R18.2 2150.86,1800 J12.29
NetJ12_31: J12.31 R17.2 | length 145.1
  Top w6: R17.2 2151.84,1900 J12.31
NetJ12_33: J12.33 R16.2 | length 145.6
  Top w6: R16.2 2151.83,2000 J12.33
NetJ12_35: J12.35 R15.2 | length 145.4
  Top w6: R15.2 2151.47,2100 J12.35
NetJ12_37: J12.37 R14.2 | length 145.3
  Top w6: R14.2 2151.09,2200 J12.37
NetJ12_39: J12.39 R13.2 | length 143.4
  Top w6: R13.2 2152.01,2300 J12.39
NetJ12_41: J12.41 R12.2 | length 144.8
  Top w6: R12.2 2153.61,2400 J12.41
NetJ12_43: J12.43 R11.2 | length 145.3
  Top w6: R11.2 2151.14,2500 J12.43
NetJ13_1: J13.1 R145.2 | length 133.3
  Top w6: R145.2 J13.1
NetJ13_3: J13.3 R144.2 | length 133.3
  Top w6: R144.2 J13.3
NetJ13_5: J13.5 R143.2 | length 133.3
  Top w6: R143.2 J13.5
NetJ13_7: J13.7 R142.2 | length 133.3
  Top w6: R142.2 J13.7
NetJ13_9: J13.9 R141.2 | length 130
  Top w6: R141.2@2665,790 J13.9
NetJ13_11: J13.11 R140.2 | length 130
  Top w6: R140.2@2665,890 J13.11
NetJ13_13: J13.13 R139.2 | length 133.3
  Top w6: R139.2 J13.13
NetJ13_15: J13.15 R138.2 | length 139.6
  Top w6: R138.2@2653.21,1089.46 R138.2@2657.67,1085 ; R138.2 J13.15
NetJ13_17: J13.17 R137.2 | length 133.3
  Top w6: R137.2 J13.17
NetJ13_19: J13.19 R136.2 | length 133.3
  Top w6: R136.2 J13.19
NetJ13_21: J13.21 R135.2 | length 135
  Top w6: R135.2@2662.07,1395 2667.07,1390 J13.21
NetJ13_23: J13.23 R134.2 | length 130
  Top w6: R134.2@2665,1490 J13.23
NetJ13_25: J13.25 R119.2 | length 133.3
  Top w6: R119.2 2668.47,1590 2788.27,1590 J13.25
NetJ13_27: J13.27 R118.2 | length 140.3
  Top w6: R118.2@2651.73,1690 2785,1690 J13.27@2790,1695
NetJ13_29: J13.29 R117.2 | length 136.2
  Top w6: R117.2@2653.21,1787.04 R117.2@2655.25,1785 ; R117.2 J13.29
NetJ13_31: J13.31 R116.2 | length 133.3
  Top w6: R116.2 J13.31
NetJ13_33: J13.33 R115.2 | length 138.3
  Top w6: R115.2@2659.34,1991.3 2662.54,1991.3 R115.2@2663.84,1990 ; R115.2 J13.33
NetJ13_35: J13.35 R114.2 | length 130
  Top w6: R114.2@2665,2090 J13.35
NetJ13_37: J13.37 R113.2 | length 353.7
  Top w6: J13.37 J13.37@2781.73,2190 ; J13.37@2795.2,2190 J13.37@2781.73,2190 ; 2675,2190 2681.73,2190 ; 2675,2190 2681.73,2190 ; 2675,2190 2681.73,2190 ; 2675,2190 2681.73,2190 ; 2681.73,2190 J13.37@2781.73,2190 ; 2681.73,2190 J13.37@2781.73,2190 ; 2681.73,2190 J13.37@2781.73,2190
NetJ13_39: J13.39 R112.2 | length 133.3
  Top w6: R112.2 J13.39
NetJ13_41: J13.41 R146.2 | length 122.3
  Top w6: R146.2@2672.66,2390 J13.41
pmem_addr0: J11.60 R112.1 | length 1761.2
  Top w5: J11.60 1144.02,2085 1175.86,2085 1230.86,2140 1310,2140 1615,2445 2450,2445 2605,2290 R112.1
pmem_addr1: J11.59 R113.1 | length 1745.4
  Top w6: J11.59 1147.24,2009.48 1167.86,2009.48 1186.61,2028.23 1186.61,2049.78 1236.83,2100 1330,2100 1585,2355 2450,2355 2610.97,2194.03 2624.24,2194.03 R113.1
pmem_addr2: J11.54 R114.1 | length 1698.9
  Top w6: J11.54 1252.13,2075 1345,2075 1610,2340 2442.44,2340 2504.95,2277.49 2504.95,2175.05 2550,2130 2590,2090 R114.1
pmem_addr3: J11.53 R115.1 | length 1706.6
  Top w6: J11.53@1236.85,1980.98 1265.35,2009.48 1362.45,2009.48 1637.97,2285 1765,2285 1795,2255 2449.41,2255 2490,2214.41 2490,2100 2600,1990 R115.1
pmem_addr4: J11.52 R14.1 | length 1059
  Top w6: J11.52 1288.46,1890 1335,1890 1498.92,2053.92 1498.92,2088.92 1653.9,2243.9 1747.55,2243.9 1791.45,2200 2115.7,2200 R14.1
pmem_addr5: J11.51 R13.1 | length 954
  Top w6: J11.51 1355.03,2040.03 1620,2305 1780,2305 1785,2300 2117.93,2300 R13.1
pmem_addr6: J11.50 R116.1 | length 1716.9
  Top w6: J11.50 1360.98,1980.98 1645,2265 1760,2265 1781,2244 2444.85,2244 2479,2209.85 2479,2019.46 2608.46,1890 R116.1
pmem_addr7: J11.48 R17.1 | length 715.7
  Top w6: J11.48 1505.03,1790.03 1565,1850 1880,1850 1930,1900 2115.65,1900 R17.1
pmem_addr8: J11.47 R18.1 | length 576.3
  Top w6: J11.47 1910.35,1770.35 1955,1815 2035,1815 2050,1800 2116.63,1800 R18.1
pmem_addr9: J11.46 R134.1 | length 1444.6
  Top w6: J11.46 1506.54,1751.6 1569.94,1815 1895,1815 1930,1850 2465.5,1850 2495,1820.5 2495,1759 2569,1685 2569,1521 2600,1490 R134.1
pmem_addr10: J11.45 R135.1 | length 1470.3
  Top w6: J11.45 1483.24,1730.98 1492.05,1722.16 1536.15,1722.16 1553.78,1739.79 1776.82,1739.79 1779.58,1737.03 2115.8,1737.03 2128.78,1750 2465,1750 2555,1660 2555,1443.46 2608.46,1390 R135.1@2624.33,1390
pmem_addr11: J11.44 R19.1 | length 556.3
  Top w6: J11.44 2033.71,1711.29 2045,1700 2115.27,1700 R19.1
pmem_addr12: J11.43 R136.1 | length 1453.5
  Top w6: J11.43 1544.97,1691.61 1555.84,1680.74 1896.83,1680.74 1970.57,1607 2010.34,1607 2053.34,1650 2470,1650 2544,1576 2544,1354.46 2608.46,1290 R136.1
pmem_addr13: J11.39 R120.1 | length 710.3
  Top w6: J11.39 1483.24,1612.87 1492.05,1604.05 1536.15,1604.05 1553.78,1621.68 1900.88,1621.68 1947.56,1575 2045,1575 2065,1595 2114.13,1595 R120.1
pmem_addr14: J11.38 R137.1 | length 1356.5
  Top w6: J11.38 1608.77,1550 2465,1550 2533,1482 2533,1265.46 2608.46,1190 R137.1
pmem_addr15: J11.37 R121.1 | length 642.3
  Top w6: J11.37 1544.97,1573.5 1555.84,1562.63 1580.59,1562.63 1611.29,1531.93 1785.79,1531.93 1817.72,1500 2117.87,1500 R121.1
pmem_addr16: J11.36 R123.1 | length 734.8
  Top w5: J11.36 1486.62,1553.81 1497.99,1542.44 1518.13,1542.44 1536.06,1524.51 1536.06,1524.05 1660.12,1400 2117.89,1400 R123.1
pmem_addr17: J11.35 R138.1 | length 1379.5
  Top w6: J11.35 1567.15,1532.57 1595.09,1532.57 1677.66,1450 2470,1450 2522,1398 2522,1176.46 2608.46,1090 R138.1
  L3 w6: J11.35 J11.35@1567.79,1531.92
pmem_addr18: J11.29 R139.1 | length 1681.9
  Top w6: J11.29 1285.04,1391.37 1578.63,1391.37 1620,1350 2474.02,1350 2511,1313.02 2511,1087.46 2608.46,990 R139.1
pmem_addr19: J11.28 R125.1 | length 901.1
  Top w6: J11.28@1236.85,1244.76 1265.35,1216.26 1553.74,1216.26 1570,1200 2117.3,1200 R125.1
pmem_addr20: J11.27 R140.1 | length 1715.2
  Top w6: J11.27 1245.67,1275.31 1579.69,1275.31 1605,1250 2475,1250 2500,1225 2500,998.46 2608.46,890 R140.1
pmem_addr21: J11.26 R124.1 | length 947.7
  Top w6: J11.26 1225.98,1334.37 1580.63,1334.37 1615,1300 2116.06,1300 R124.1
pmem_addr22: J11.25 R126.1 | length 1000.6
  Top w6: J11.25 1262.55,1160 1530,1160 1590,1100 2117.58,1100 R126.1
pmem_addr23: J11.24 R142.1 | length 1901.4
  Top w6: J11.24 1158.11,1268.05 1149.3,1259.24 1149.3,1232.95 1252.25,1130 1510,1130 1590,1050 2435,1050 2475,1010 2475,900 2560,815 2560,715 2585,690 R142.1
pmem_addr24: J11.23 R141.1 | length 1894.4
  Top w5: J11.23 1138.65,1362.87 1189.17,1312.35 1189.17,1272.98 1205.8,1256.35 1205.8,1236.21 1252.01,1190 1540,1190 1580,1150 2475,1150 2489.5,1135.5 2489.5,909.46 2608.96,790 R141.1
pmem_addr25: J11.22 R127.1 | length 1101.6
  Top w6: J11.22 1268.5,1095 1490,1095 1585,1000 2116.43,1000 R127.1
pmem_addr26: J11.21 R144.1 | length 2153.9
  Top w6: J11.21 1070.56,1275.31 1049.94,1275.31 1031.19,1256.56 1031.19,1198.81 1225,1005 1392.32,1005 1547.32,850 2450,850 2530,770 2530,568.46 2608.46,490 R144.1
pmem_addr27: J11.20 R143.1 | length 2079.5
  Top w6: J11.20 1080.31,1362.87 1127.56,1315.62 1127.56,1292.01 1109.83,1274.28 1107.96,1274.28 1090.24,1256.56 1090.24,1229.76 1245,1075 1480,1075 1605,950 2430,950 2464,916 2464,891 2545,810 2545,653.46 2608.46,590 R143.1
pmem_addr28: J11.19 R128.1 | length 1223.1
  Top w6: J11.19 1059.69,1209.31 1234,1035 1410,1035 1545,900 2117.59,900 R128.1
pmem_addr29: J11.15 R132.1 | length 2096.6
  Top w6: v1(725,1450) 885,1450 925,1410 925,1160 1045,1040 1045,965 1105,905 1360,905 1765,500 R132.1
  L2 w6: v1(717.22,1512.22) 717.22,1480.78 725,1473 v1(725,1450)
  Bottom w6: v1(717.22,1512.22) 768.09,1512.22 J11.15
pmem_addr30: J11.14 R131.1 | length 1905.9
  Top w5: J11.14 868.51,1534.13 879.88,1522.76 900.02,1522.76 940,1482.78 940,1180 1060,1060 1060,970 1105,925 1370,925 1694.98,600.01 R131.1
pmem_addr31: J11.13 R130.1 | length 1810.3
  Top w5: J11.13 950,1492.24 950,1190 1070,1070 1070,985 1110,945 1375,945 1620,700 R130.1
pmem_addr32: J11.12 R145.1 | length 2750
  Top w5: J11.12 770.31,1573.72 817.77,1621.18 840.97,1621.18 858.9,1603.25 858.9,1602.8 877.59,1584.1 897.73,1584.1 965,1516.84 965,1200 1085,1080 1085,990 1110,965 1376.46,965 1591.46,750 2460,750 2519.5,690.5 2519.5,479.46 2608.96,390 R145.1
pmem_read: J11.63 R11.1 | length 1266.8
  Top w5: J11.63 1114.97,2115 1170,2115 1225,2170 1300,2170 1628.99,2498.99 R11.1
pmem_resp: J11.61 R12.1 | length 1281.9
  Top w5: J11.61 1079.37,1961.06 1090.74,1972.43 1090.74,1992.57 1110.2,2012.03 1110.65,2012.03 1128.58,2029.96 1128.58,2050.1 1148.48,2070 1175,2070 1225,2120 1320,2120 1597.58,2397.58 R12.1
pmem_write: J11.62 R146.1 | length 1830.7
  Top w5: J11.62 1059.69,2020.12 1071.06,2031.49 1071.06,2051.63 1094.43,2075 1105,2075 1130,2100 1176.72,2100 1231.72,2155 1305,2155 1610,2460 2530,2460 2600,2390 R146.1
rc5_en: J11.5 R118.1 | length 2189.3
  Top w6: J11.5 829.37,1712.22 878.68,1761.53 901.53,1761.53 980,1840 1350,1840 1560,2050 2420,2050 2455,2015 2455,2005 2525,1935 2525,1773.46 2608.46,1690 R118.1
rc5_in: J11.4 R16.1 | length 1340.4
  Top w6: J11.4 895.98,1730.98 990,1825 1370,1825 1545,2000 2114.96,2000 R16.1
rc5_out: J11.2 R15.1 | length 1424.9
  Top w6: J11.2 829.37,1771.28 917.09,1859 1353.44,1859 1579.44,2085 1740,2085 1755,2100 2115.32,2100 R15.1
rc5_valid: J11.3 R117.1 | length 2301.4
  Top w6: J11.3 889.65,1870 1345,1870 1586,2111 1663.33,2111 1670.45,2103.88 1728.45,2103.88 1774.56,2150 2450,2150 2468,2132 2468,2014.9 2545,1937.9 2545,1845 2600,1790 R117.1
reset: J11.10 R129.1 | length 1746
  Top w5: J11.10 985.16,1516.13 985.16,1209.84 1210,985 1385,985 1570,800 R129.1
VCC: C21.2 C22.2 C23.2 C24.2 C25.1 C26.1 C27.1 C28.1 C29.1 C210.1 C211.1 C212.1 C213.2 C214.2 C215.2 C216.2 C217.1 C218.1 C219.1 C220.1 C221.1 C222.1 C223.1 C224.1 C225.2 C226.2 C227.2 C228.2 C229.1 C230.1 C231.1 C232.1 C233.1 C234.1 C235.1 C236.1 C237.2 C238.2 C239.2 C240.2 C241.1 C242.1 C243.1 C244.1 C245.1 C246.1 C247.1 C248.1 J11.9 J11.31 J11.41 J11.57 J22.1 | length 9345.1
  Top w20: J11.31@1293.29,1242.14 J11.31
  Bottom w20: C214.2 635,1632.55 C216.2 ; C213.2 699.97,1632.55 C215.2@699.97,1685.34 ; C228.2 1158.11,2095 C225.2 ; C227.2 1158.11,2160 C226.2 ; C23.2 1295.91,1090 C24.2 ; C22.2 1295.91,1160 C21.2 ; C237.2 1645,1652.24 C239.2 ; C240.2 1715,1652.24 C238.2
  Bottom w25: C224.1 375,1632.55 C223.1 ; C221.1 440.89,1583.45 440.89,1632.55 440.89,1686.31 C222.1 ; C220.1 505,1632.55 C218.1 ; C217.1 567.5,1687.89 567.5,1632.55 567.5,1582.11 C219.1 ; C233.1 914.63,2397.07 914.63,2340 914.63,2287.93 C236.1 ; C234.1 974.63,2397.07 974.63,2340 974.63,2287.93 C235.1 ; C229.1 1090.54,2269.39 1158.11,2269.39 1219.79,2269.39 C230.1 ; C232.1 1158.11,2220 C231.1 ; C28.1 1243.66,937.62 1295.91,937.62 1349.71,937.62 C27.1 ; C25.1 1295.91,1005 C26.1 ; C212.1 1246.28,868.71 1295.91,868.71 1347.41,868.71 C210.1 ; C211.1 1295.91,799.67 C29.1 ; C241.1 1785,1652.24 C242.1 ; C244.1 1835,1652.24 C243.1 ; C248.1 1880.62,1593.18 1880.62,1652.24 1880.62,1717.54 C246.1 ; C245.1 1930.37,1592.93 1930.37,1652.24 1930.37,1717.07 C247.1
  Bottom w50: J11.9 699.97,1632.55 635,1632.55 567.5,1632.55 505,1632.55 440.89,1632.55 375,1632.55 237.55,1632.55 235,1630 235,1840 735,2340 914.63,2340 974.63,2340 1115,2340 1158.11,2296.89 1158.11,2269.39 1158.11,2220 1158.11,2160 1158.11,2095 J11.57 ; 1295.91,730 1685,730 1990,1035 1990,1625 1962.76,1652.24 1930.37,1652.24 1880.62,1652.24 1835,1652.24 1785,1652.24 1715,1652.24 1645,1652.24 J11.41 ; 1295.91,760.91 1295.91,799.67 1295.91,868.71 1295.91,937.62 1295.91,1005 1295.91,1090 1295.91,1160 J11.31
  Bottom w80: 235,1630 235,1140 475,900 J22.1 745,730 1295.91,730
pads on no net: J11.1 J11.6 J11.16 J11.17 J11.18 J11.32 J11.33 J11.34 J11.42 J11.49 J11.56 J11.58 J11.65 J11.66 J12.1 J13.43
copper on no net:
  other v3: 65,65 3180,65 65,2845 3180,2845

## Polygon pours and split planes (outlines as drawn)
GND on L2 "GND_L02_P000" (solid, pour order 0): 0,2910 0,0 3245,0 3245,2910
GND on L3 "GND_L03_P001" (solid, pour order 1): 3245,2910 3245,0 0,0 0,2910

## Silkscreen, mask and mechanical layers (free items; w line width, h text height)
Top Overlay:
  text "Core CLK" at 162.33,2695.46 h60
  text "Mem CLK" at 1020,2695 h60
  text "VCC" at 405,720 h60
  text "GND" at 995,700 h60
Bottom Overlay:
  region: 1879.18,2133.88 1879.18,2101.36 1798.74,2101.36 1798.74,1959.84 2167.18,1959.84 2167.18,2101.36 2085,2101.36 2085,2348.64 2167.18,2348.64 2167.18,2492.89 1798.74,2492.89 1798.74,2348.64 1879.18,2348.64 1879.18,2134.13
  text "Designed By:" at 3080,2689.99 h60
  text "Collin Meyer" at 3080,2604.99 h60
  text "4/1/2024, Champaign, Il." at 2605.01,1870 h60 r90